# Altium PCB 3_5_inch_V1.PcbDoc
Units mm, origin at the board's own origin, x right, y up, seen from the top; angles counter-clockwise.
Board outline 37.85 x 32.13 mm, 4 copper layers (Top Copper, Signal Layer 1, Signal Layer 2, Bottom Copper), stack 1.17 mm thick; 14 components, 43 nets, 124 pads, 111 vias.
Unrouted connection lines stored in the file: 2.
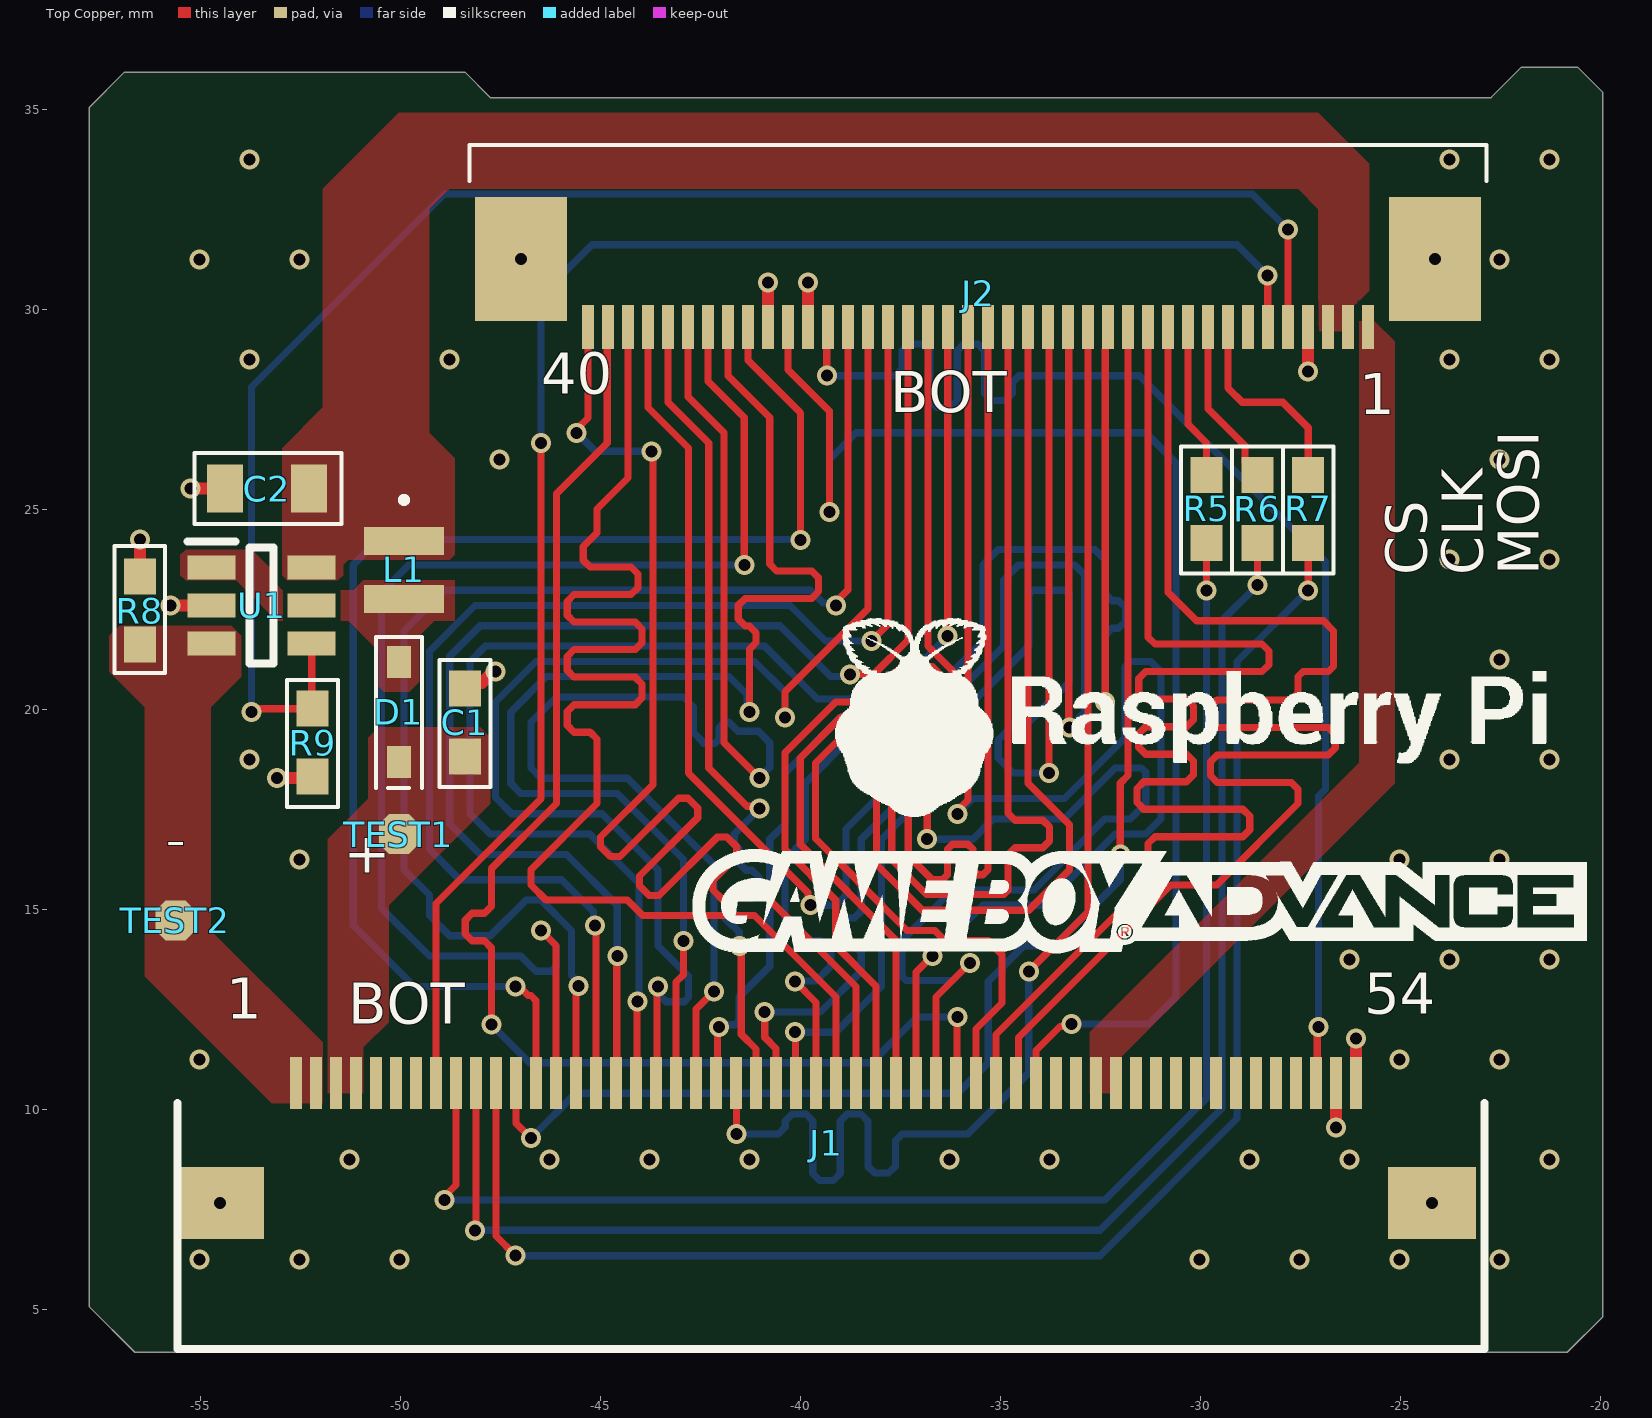
[diagram p0: Top Copper view]
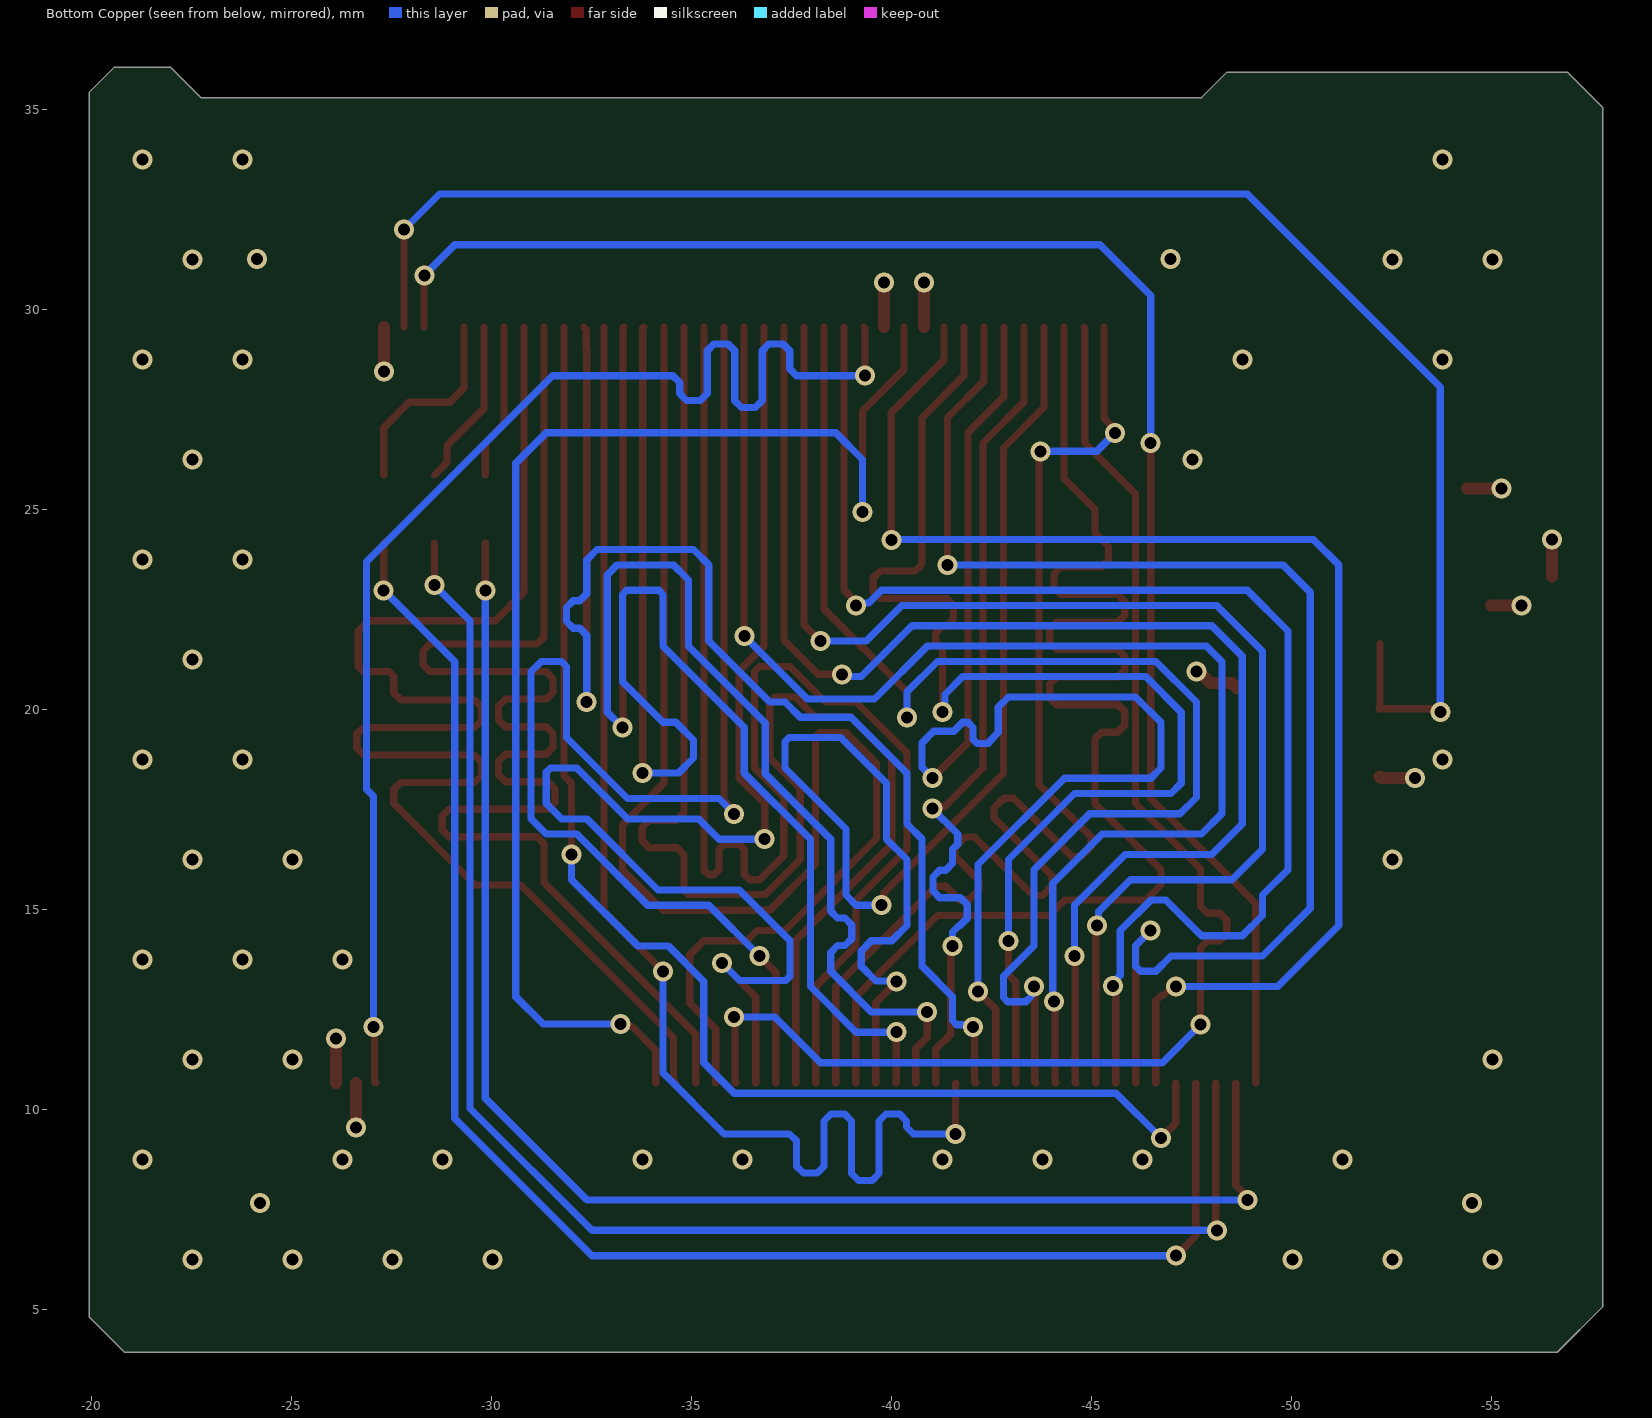
[diagram p1: Bottom Copper view, seen from below]
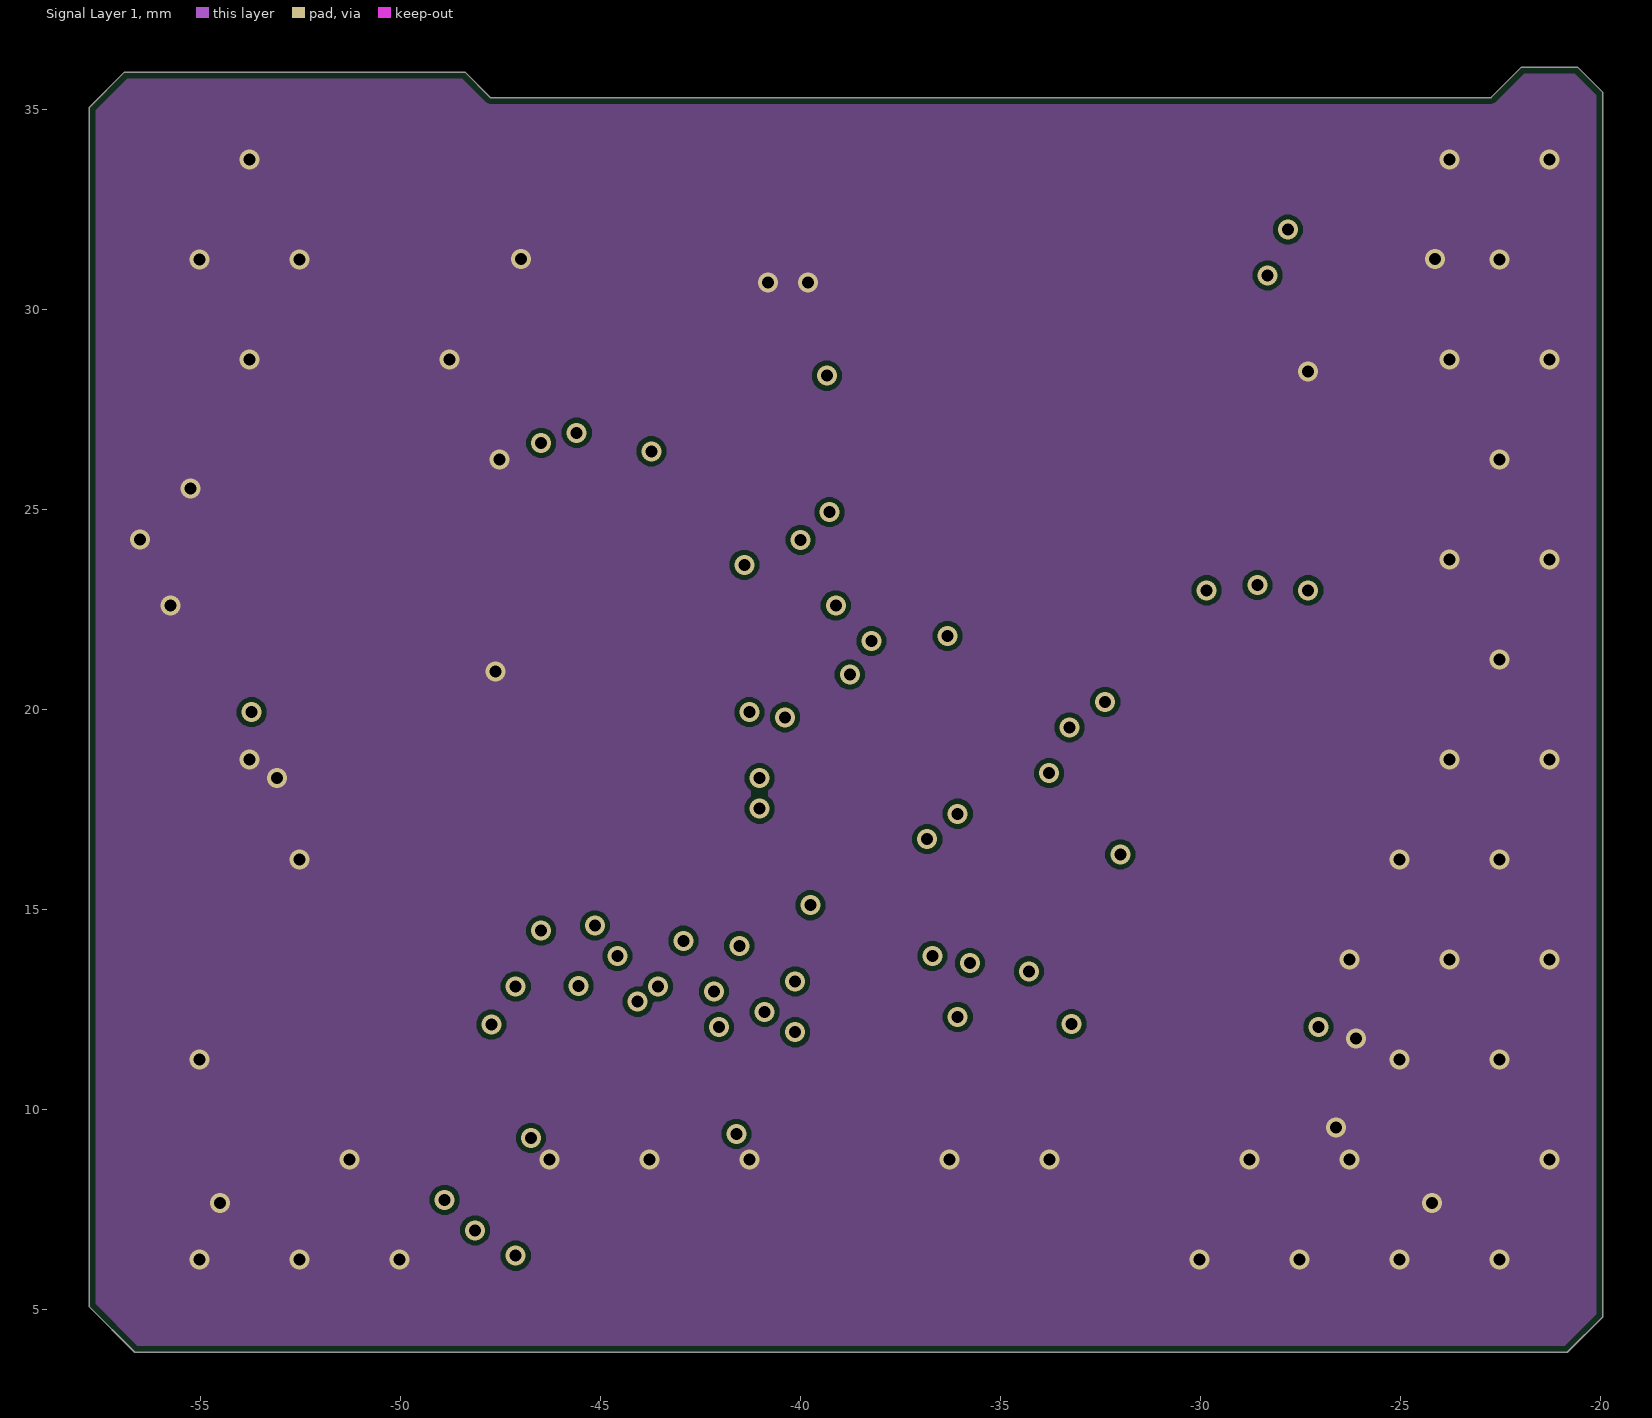
[diagram p2: Signal Layer 1]
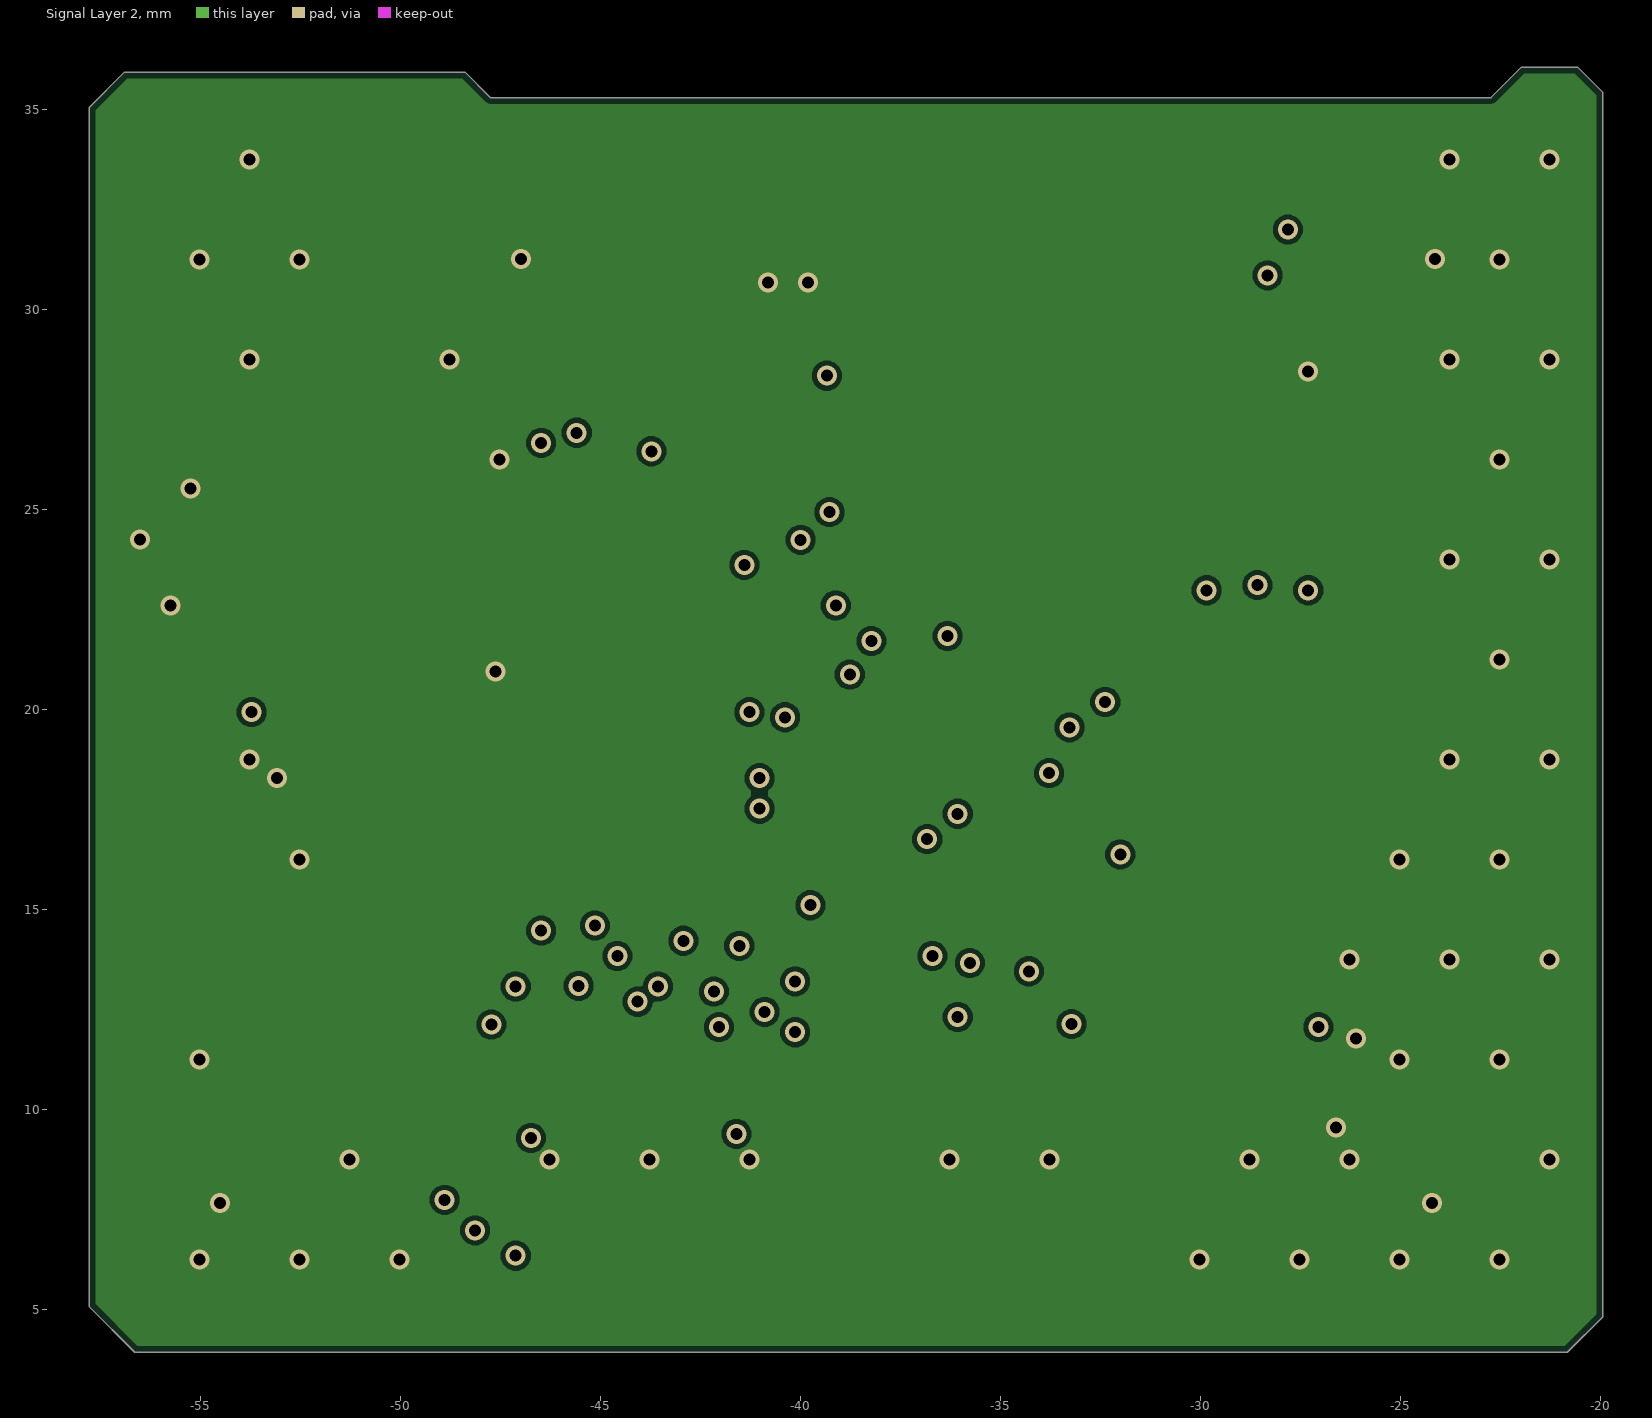
[diagram p3: Signal Layer 2]

## Layer stack, top to bottom
Top Mask: solder mask 0.015, Solder Resist, Dk 3.8
Top Copper: signal copper 0.035
Dielectric 1: prepreg 0.1, 2313, Dk 4.05
Signal Layer 1: signal copper 0.0175
Core: core 0.865, FR-4, Dk 4.5
Signal Layer 2: signal copper 0.0175
Dielectric 2: prepreg 0.1, 2313, Dk 4.05
Bottom Copper: signal copper 0.035
Bottom Mask: solder mask 0.015, Solder Resist, Dk 3.8

## Board outline
-57.785,5.08 -57.785,35.052 -56.896,35.941 -48.387,35.941 -47.752,35.306 -22.733,35.306 -21.971,36.068 -20.574,36.068 -19.939,35.433 -19.939,4.826 -20.828,3.937 -56.642,3.937

## Design rules (kind name [scope] priority, off if disabled: settings)
BoardOutlineClearance [All] p1: gap=0.15 ignorepadtopadclearanceinfootprint=FALSE except(0.4: Arc-SplitBarrior Arc-SplitContinuation Track-SplitBarrior Track-SplitContinuation SMDPad-SplitBarrior SMDPad-SplitContinuation THPad-SplitBarrior THPad-SplitContinuation Via-SplitBarrior Via-SplitContinuation Fill-SplitBarrior Fill-SplitContinuation Poly-SplitBarrior Poly-SplitContinuation Region-SplitBarrior Region-SplitContinuation Text-SplitBarrior Text-SplitContinuation)
Clearance USB [InAnyDifferentialPair] p1: gap=0.25 ignorepadtopadclearanceinfootprint=FALSE except(0.09: Arc-Arc Arc-Track Arc-SMDPad Arc-THPad Arc-Via Track-Track Track-SMDPad Track-THPad Track-Via SMDPad-SMDPad SMDPad-THPad SMDPad-Via THPad-THPad THPad-Via Via-Via; 0.127: Arc-Hole Track-Hole SMDPad-Hole THPad-Hole Via-Hole Fill-Hole Poly-Hole Region-Hole Text-Hole; 0.254: Arc-Text Track-Text SMDPad-Text THPad-Text Via-Text Fill-Text Poly-Text Region-Text Text-Text)
Clearance RGB24 [InNetClass('RGB24Bit')] p2: gap=0.09 ignorepadtopadclearanceinfootprint=FALSE except(0.12: SMDPad-Fill SMDPad-Poly SMDPad-Region THPad-Fill THPad-Poly THPad-Region Via-Fill Via-Poly Via-Region; 0.127: Arc-Hole Track-Hole SMDPad-Hole THPad-Hole Via-Hole Fill-Hole Poly-Hole Region-Hole Text-Hole; 0.25: Arc-Fill Arc-Poly Arc-Region Track-Fill Track-Poly Track-Region Fill-Fill Fill-Poly Fill-Region Poly-Poly Poly-Region Region-Region; 0.254: Arc-Text Track-Text SMDPad-Text THPad-Text Via-Text Fill-Text Poly-Text Region-Text Text-Text)
Clearance [All] p3: gap=0.12 ignorepadtopadclearanceinfootprint=FALSE except(0.09: Arc-Arc Arc-Track Arc-SMDPad Track-Track Track-SMDPad SMDPad-SMDPad; 0.127: Arc-Via Arc-Hole Track-Via Track-Hole SMDPad-Via SMDPad-Hole THPad-Via THPad-Hole Via-Via Via-Hole Fill-Hole Poly-Hole Region-Hole Text-Hole; 0.2: Arc-THPad Track-THPad SMDPad-THPad THPad-THPad; 0.254: Arc-Text Track-Text SMDPad-Text THPad-Text Via-Text Fill-Text Poly-Text Region-Text Text-Text)
ComponentClearance [All] p1: gap=0.127 collisioncheckmode=3 verticalgap=0.254 showdistances=FALSE
HoleSize [All] p1: absolutevalues=TRUE maxlimit=6.3 minlimit=0.3 maxpercent=80.000 minpercent=20.000
MinimumAnnularRing [All] p1: minimumring=0.076
MinimumSolderMaskSliver [All] p1: minsoldermaskwidth=0
PlaneClearance [All] p1: clearance=1
PlaneConnect [All] p1: planeconnectstyle=Direct reliefexpansion=0.508 reliefentries=4 reliefconductorwidth=0.254 reliefairgap=0.254
PolygonConnect PolygonConnect_1 [All] p1: connectstyle=Direct reliefconductorwidth=0.508 reliefentries=4 polygonreliefangle="45 Angle" airgapwidth=0.254
RoomDefinition 3_5_inch [InComponentClass('3_5_inch')] p1: confinementstyle=ConfineIn formatcopy=TRUE lockcomponents=FALSE outline -155.02,-43.742 -104.22,-43.742 -104.22,-18.342 -155.02,-18.342
RoutingCorners [All] p1: cornerstyle=Round minsetback=2.54 maxsetback=2.54
RoutingVias [All] p1: holewidth=0.5 width=1 viastyle="Through Hole" minholewidth=0.2 minwidth=0.45 maxholewidth=1 maxwidth=2
SilkToSilkClearance [All] p1: silktosilkclearance=0.1
SilkToSolderMaskClearance [IsPad] p1: minsilkscreentomaskgap=0.1 clearancetoexposedcopper=TRUE
SolderMaskExpansion [All] p1: expansion=0.102 istentingtop=FALSE
UnRoutedNet [All] p1: checkbadconnections=TRUE
Width [All] p1: maxlimit=8 minlimit=0.18 preferedwidth=0.18
Width "Schematic Width Constraint" [InNetClass('RGB24Bit')] p2: maxlimit=0.254 minlimit=0.18 preferedwidth=0.18 toplayer_maxwidth=0.18 bottomlayer_maxwidth=0.18 minimp=50.000000 maximp=50.000000 favimp=50.000000
21 further rules are at their usual default settings.

## Classes and differential pairs
net class RGB24Bit: CS DB_0 DB_1 DB_2 DB_3 DB_4 DB_5 DB_6 DB_7 DCLK DE DG_0 DG_1 DG_2 DG_3 DG_4 DG_5 DG_6 DG_7 DR_0 DR_1 DR_2 DR_3 DR_4 DR_5 DR_6 DR_7 GPIO_2 GPIO_3

## Components (designator, comment, footprint, x,y, rotation, side; value= is the part's Value field where it differs from the comment)
C1 "1UF 25v X5R 0603" "C 0603/1608" -48.387,19.685 r90 top
C2 "10uF 16V X7R 0805" "C 0805/2012" -53.34,25.527 r0 top
D1 "40V 250mA SOD323" SOD-323 -50.038,19.939 r90 top
J1 "54P 0.5m BOT" FFC2B35-54-G -42.858,9.818 r180 top locked
J2 "40P 0,5mm Bot" 417345920 -35.56,29.718 r180 top
L1 "6.8uH 0,.7A" NRH2410T6R8MN -49.911,23.495 r270 top
R5 "0R" "R 0603/1608" -29.845,25.019 r90 top
R6 "0R" "R 0603/1608" -28.575,25.019 r90 top
R7 "0R" "R 0603/1608" -27.305,25.019 r90 top
R8 "10R 0603 1%" "R 0603/1608" -56.515,22.479 r270 top
R9 "1M 1% 1/10W 0603" "R 0603/1608" -52.197,19.177 r90 top
TEST1 "TestPad" TestPad -50.038,16.891 r90 top
TEST2 "TestPad" TestPad -55.626,14.732 r90 top
U1 "Backlight Driver" SOT95P280X145-6N -53.467,22.606 r0 top

## Footprints (in the part's own frame and the unit in brackets; to place one, negate y for a bottom-side part, rotate by r counter-clockwise, add the part's x,y. Pads: shape width x height; smd on the part's side, far side on the other; paste and mask are expansions set on the pad)
417345920 [mm]
  rect 0.3x1.1 smd: 1(-9.75,0.15) 2(-9.25,0.15) 3(-8.75,0.15) 4(-8.25,0.15) 5(-7.75,0.15) 6(-7.25,0.15) 7(-6.75,0.15) 8(-6.25,0.15) 9(-5.75,0.15) 10(-5.25,0.15) 11(-4.75,0.15) 12(-4.25,0.15) 13(-3.75,0.15) 14(-3.25,0.15) 15(-2.75,0.15) 16(-2.25,0.15) 17(-1.75,0.15) 18(-1.25,0.15) 19(-0.75,0.15) 20(-0.25,0.15) 21(0.25,0.15) 22(0.75,0.15) 23(1.25,0.15) 24(1.75,0.15) 25(2.25,0.15) 26(2.75,0.15) 27(3.25,0.15) 28(3.75,0.15) 29(4.25,0.15) 30(4.75,0.15) 31(5.25,0.15) 32(5.75,0.15) 33(6.25,0.15) 34(6.75,0.15) 35(7.25,0.15) 36(7.75,0.15) 37(8.25,0.15) 38(8.75,0.15) 39(9.25,0.15) 40(9.75,0.15)
  rect 2.3x3.1 smd: SH(-11.42,-1.55) SH(11.42,-1.55)
  silkscreen extent -12.72,-4.4 12.72,-3.5, body extent -12.72,-4.62 12.72,0.49, height 2.05
"C 0603/1608" [mm]
  rect 0.9x0.8 smd: 1(-0.85,0) 2(0.85,0)
  silkscreen extent -1.61,-0.64 1.56,0.64, body extent -1.3,-0.4 1.3,0.4, height 0.64
"C 0805/2012" [mm]
  rect 0.9x1.2 smd: 1(-1.05,0) 2(1.05,0)
  silkscreen extent -1.81,-0.89 1.87,0.89, body extent -1.5,-0.6 1.5,0.6, height 0.64
FFC2B35-54-G [mm]
  rect 0.3x1.3 smd: 1(9.75,-0.85) 2(9.25,-0.85) 3(8.75,-0.85) 4(8.25,-0.85) 5(7.75,-0.85) 6(7.25,-0.85) 7(6.75,-0.85) 8(6.25,-0.85) 9(5.75,-0.85) 10(5.25,-0.85) 11(4.75,-0.85) 12(4.25,-0.85) 13(3.75,-0.85) 14(3.25,-0.85) 15(2.75,-0.85) 16(2.25,-0.85) 17(1.75,-0.85) 18(1.25,-0.85) 19(0.75,-0.85) 20(0.25,-0.85) 21(-0.25,-0.85) 22(-0.75,-0.85) 23(-1.25,-0.85) 24(-1.75,-0.85) 25(-2.25,-0.85) 26(-2.75,-0.85) 27(-3.25,-0.85) 28(-3.75,-0.85) 29(-4.25,-0.85) 30(-4.75,-0.85) 31(-5.25,-0.85) 32(-5.75,-0.85) 33(-6.25,-0.85) 34(-6.75,-0.85) 35(-7.25,-0.85) 36(-7.75,-0.85) 37(-8.25,-0.85) 38(-8.75,-0.85) 39(-9.25,-0.85) 40(-9.75,-0.85) 41(-10.25,-0.85) 42(-10.75,-0.85) 43(-11.25,-0.85) 44(-11.75,-0.85) 45(-12.25,-0.85) 46(-12.75,-0.85) 47(-13.25,-0.85) 48(-13.75,-0.85) 49(-14.25,-0.85) 50(-14.75,-0.85) 51(-15.25,-0.85) 52(-15.75,-0.85) 53(-16.25,-0.85) 54(-16.75,-0.85)
  rect 2.2x1.8 smd: SH(-18.65,2.15) SH(11.65,2.15)
  silkscreen extent -19.96,-0.35 12.72,5.8, body extent -19.21,-1.16 12.19,5.6, height 1.99
NRH2410T6R8MN [mm]
  rect 0.7x2 smd: 1(-0.725,0) 2(0.725,0)
  silkscreen extent -1.8,-0.05 -1.7,0.05, body extent -1.2,-1.2 1.2,1.2, height 1.1
"R 0603/1608" [mm]
  rect 0.9x0.8 smd: 1(-0.85,0) 2(0.85,0)
  silkscreen extent -1.61,-0.64 1.56,0.64, body extent -1.3,-0.4 1.3,0.4, height 0.64
SOD-323 [mm]
  rect 0.8x0.6 smd: 1(-1.25,0) 2(1.25,0)
  silkscreen extent -1.9,-0.58 1.88,0.58, body extent -1.23,-0.63 1.28,0.63, height 0.9
SOT95P280X145-6N [mm]
  rect 1.2x0.6 smd: 1(-1.25,0.95) 2(-1.25,0) 3(-1.25,-0.95) 4(1.25,-0.95) 5(1.25,0) 6(1.25,0.95)
  silkscreen extent -1.85,-1.45 0.3,1.6, body extent -1.4,-1.45 1.4,1.45, height 1.45
TestPad [mm]
  oct 1x1 smd paste-2: 1(0,0)

## Part data
C1: library part CC0603KRX5R8BB105, "CAP CER 1UF 25V X5R 0603", Capacitance=1uF, Case Code (Imperial)=0603, Case Code (Metric)=1608, Dielectric=X5R, Manufacturer=Yageo, Max Operating Temperature=85°C, Min Operating Temperature=-55°C, Package Quantity=1, Supplier Part Number 1=603-CC603KRX5R8BB105, Tolerance=10%, Voltage Rating=25V, Case/Package=0603, ComponentLink1Description=https://datasheet.ciiva.com/176/mlccorderingcode-176785.pdf?src-supplier=Digi-Key, ComponentLink1URL=https://datasheet.ciiva.com/176/mlccorderingcode-176785.pdf?src-supplier=Digi-Key, ComponentLink2Description=https://datasheet.ciiva.com/176/mlccorderingcode-176786.pdf?src-supplier=Digi-Key, ComponentLink2URL=https://datasheet.ciiva.com/176/mlccorderingcode-176786.pdf?src-supplier=Digi-Key, ComponentLink3Description=https://datasheet.ciiva.com/176/mlccorderingcode-176787.pdf?src-supplier=Digi-Key, ComponentLink3URL=https://datasheet.ciiva.com/176/mlccorderingcode-176787.pdf?src-supplier=Digi-Key, ComponentLink4Description=https://datasheet.ciiva.com/17436/upy-gphc-x5r-4v-to-50v-12-17436952.pdf?src-supplier=Avnet+Europe, ComponentLink4URL=https://datasheet.ciiva.com/17436/upy-gphc-x5r-4v-to-50v-12-17436952.pdf?src-supplier=Avnet+Europe, ComponentLink5Description=https://datasheet.ciiva.com/7978/1525783-7978171.pdf?src-supplier=Element14, ComponentLink5URL=https://datasheet.ciiva.com/7978/1525783-7978171.pdf?src-supplier=Element14, ComponentLink6Description=https://datasheet.ciiva.com/11586/upy-gphc-x5r-4v-to-50v-12-11586318.pdf?src-supplier=Avnet, ComponentLink6URL=https://datasheet.ciiva.com/11586/upy-gphc-x5r-4v-to-50v-12-11586318.pdf?src-supplier=Avnet, Depth=0.8mm, Halogen Free="Halogen Free", Height=0.8mm, Lead Free="Lead Free", Length=1.6mm, Manufacturer Part Number=CC0603KRX5R8BB105, Mount="Surface Mount", Number of Pins=2, Packaging="Tape and Reel", Pricing 1="1 = 0,10000, 10 = 0,04700, 50 = 0,04700, 100 = 0,01700, 1000 = 0,01600, 10000 = 0,00800 (USD)", Radiation Hardening=No, REACH SVHC="No SVHC", RoHS=Yes, Stock 1=9567246, Supplier 1=Mouser, Termination=SMD/SMT, Thickness=0.035inch, Voltage Rating (DC)=25V, Width=0.031inch
C2: library part CL21B106KOQNNNE, "CAP CER 10UF 16V X7R 0805", Manufacturer="Samsung Electro-Mechanics", Operating Temperature="-55°C ~ 125°C", Package / Case="0805 (2012 Metric)", Ratings=-, Supplier Part Number 1=1276-2872-1-ND, Temperature Coefficient=X7R, Tolerance=±10%, Voltage - Rated=16V, Applications="General Purpose", Category=Capacitors, ComponentLink1Description=http://www.samsungsem.com/kr/support/product-search/mlcc/CL21B106KOQNNNE.jsp, ComponentLink1URL=http://www.samsungsem.com/kr/support/product-search/mlcc/CL21B106KOQNNNE.jsp, Features=-, Height - Seated (Max)=-, Lead Spacing=-, Lead Style=-, Manufacturer Part Number=CL21B106KOQNNNE, Mounting Type="Surface Mount, MLCC", Notification="Current market demand for these product types have resulted in fluctuating and extending lead times. Lead times may differ.", Packaging="Cut Tape (CT)", Part Status=Active, Pricing 1="1=0.24, 10=0.163, 100=0.0923, 500=0.06514, 1000=0.057 (GBP)", RoHS="RoHS Compliant", Size / Dimension="0.079\" L x 0.049\" W (2.00mm x 1.25mm)", Stock 1=20000, Supplier 1=Digi-Key, Thickness (Max)="0.055\" (1.40mm)"
D1: library part NSR0240HT1G, "DIODE SCHOTTKY 40V 250MA SOD323", Average Rectified Current=250mA, Case/Package=SOD-323-2, Forward Voltage=710mV, Manufacturer="ON Semiconductor", Max Forward Surge Current (Ifsm)=1A, Max Operating Temperature=150°C, Max Repetitive Reverse Voltage (Vrrm)=40V, Max Reverse Leakage Current=10uA, Min Operating Temperature=-55°C, Package Quantity=1, Power Dissipation=270mW, Supplier Part Number 1=863-NSR0240HT1G, ComponentLink1Description=https://datasheet.ciiva.com/4714/nsr0240h-d-113658-4714368.pdf?src-supplier=Mouser, ComponentLink1URL=https://datasheet.ciiva.com/4714/nsr0240h-d-113658-4714368.pdf?src-supplier=Mouser, ComponentLink2Description=https://datasheet.ciiva.com/8293/nsr0240h-d-8293840.pdf?src-supplier=Avnet, ComponentLink2URL=https://datasheet.ciiva.com/8293/nsr0240h-d-8293840.pdf?src-supplier=Avnet, ComponentLink3Description=https://datasheet.ciiva.com/25949/nsr0240h-d-25949637.pdf?src-supplier=Avnet+Europe, ComponentLink3URL=https://datasheet.ciiva.com/25949/nsr0240h-d-25949637.pdf?src-supplier=Avnet+Europe, ComponentLink4Description=https://datasheet.ciiva.com/915/nsr0240h-d-915416.pdf?src-supplier=Digi-Key, ComponentLink4URL=https://datasheet.ciiva.com/915/nsr0240h-d-915416.pdf?src-supplier=Digi-Key, ComponentLink5Description=https://datasheet.ciiva.com/915/nsr0240h-d-915417.pdf?src-supplier=Digi-Key, ComponentLink5URL=https://datasheet.ciiva.com/915/nsr0240h-d-915417.pdf?src-supplier=Digi-Key, ComponentLink6Description=https://datasheet.ciiva.com/16396/nsr0240h-d-16396521.pdf?src-supplier=Future+Electronics, ComponentLink6URL=https://datasheet.ciiva.com/16396/nsr0240h-d-16396521.pdf?src-supplier=Future+Electronics, ComponentLink7Description=https://datasheet.ciiva.com/915/nsr0240h-d-915418.pdf?src-supplier=Digi-Key, ComponentLink7URL=https://datasheet.ciiva.com/915/nsr0240h-d-915418.pdf?src-supplier=Digi-Key, ComponentLink8Description=https://datasheet.ciiva.com/7963/nsr0240h-d-7963165.pdf?src-supplier=Element14, ComponentLink8URL=https://datasheet.ciiva.com/7963/nsr0240h-d-7963165.pdf?src-supplier=Element14, Contact Plating=Tin, Element Configuration=Single, Forward Current=250mA, Height=1mm, Lead Free="Lead Free", Length=1.8mm, Manufacturer Part Number=NSR0240HT1G, Max Reverse Voltage (DC)=40V, Max Surge Current=1A, Number of Pins=2, Packaging="Tape and Reel", Peak Non-Repetitive Surge Current=1A, Peak Reverse Current=10uA, Pricing 1="1 = 0,23000, 10 = 0,15400, 50 = 0,15400, 100 = 0,06500, 1000 = 0,04400, 10000 = 0,03000 (USD)", Radiation Hardening=No, REACH SVHC="No SVHC", Recovery Time=3ns, Reverse Recovery Time=3ns, RoHS=Yes, Stock 1=30582, Supplier 1=Mouser, Width=1.35mm
J1: library part FFC2B35-54-G, "54W, 0.5MM Ffc Con, R/a, Bottom Con", Manufacturer="Global Connector Technology", Supplier Part Number 1=640-FFC2B35-54-G, Manufacturer Part Number=FFC2B35-54-G, RoHS=No, Supplier 1=Mouser
J2: library part 4-1734592-0, "CONN FPC BOTTOM 40POS 0.50MM R/A", Actuator Color=Beige, Contact Current Rating=500mA, Contact Resistance=35mR, Flammability Rating="UL94 V-0", Housing Color=Natural, Manufacturer="TE Connectivity", Max Operating Temperature=85°C, Max Voltage Rating (AC)=250V, Min Operating Temperature=-40°C, Package Quantity=2000, Supplier Part Number 1=571-4-1734592-0, Actuator Material=Thermoplastic, Category="FFC / FPC", ComponentLink1Description=https://datasheet.ciiva.com/16317/4-1734592-0-16317310.pdf?src-supplier=Future+Electronics, ComponentLink1URL=https://datasheet.ciiva.com/16317/4-1734592-0-16317310.pdf?src-supplier=Future+Electronics, ComponentLink2Description=https://datasheet.ciiva.com/10365/eng-ds-1-1773440-6-0506-10365927.pdf?src-supplier=Avnet, ComponentLink2URL=https://datasheet.ciiva.com/10365/eng-ds-1-1773440-6-0506-10365927.pdf?src-supplier=Avnet, ComponentLink3Description=https://datasheet.ciiva.com/46396/1795029-46396773.pdf?src-supplier=Element14, ComponentLink3URL=https://datasheet.ciiva.com/46396/1795029-46396773.pdf?src-supplier=Element14, ComponentLink4Description=https://datasheet.ciiva.com/1437/586796-1437950.pdf?src-supplier=Element14, ComponentLink4URL=https://datasheet.ciiva.com/1437/586796-1437950.pdf?src-supplier=Element14, ComponentLink5Description=https://datasheet.ciiva.com/669/eng-cd-1734592-c-c-1734592-669272.pdf?src-supplier=Digi-Key, ComponentLink5URL=https://datasheet.ciiva.com/669/eng-cd-1734592-c-c-1734592-669272.pdf?src-supplier=Digi-Key, ComponentLink6Description=https://datasheet.ciiva.com/669/eng-cd-1734592-c-c-1734592-669273.pdf?src-supplier=Digi-Key, ComponentLink6URL=https://datasheet.ciiva.com/669/eng-cd-1734592-c-c-1734592-669273.pdf?src-supplier=Digi-Key, ComponentLink7Description=https://datasheet.ciiva.com/669/eng-cd-1734592-c-c-1734592-669274.pdf?src-supplier=Digi-Key, ComponentLink7URL=https://datasheet.ciiva.com/669/eng-cd-1734592-c-c-1734592-669274.pdf?src-supplier=Digi-Key, Connector System=Flex-to-Board, Connector Type=Receptacle,Connector,Socket, Contact Location=Bottom, Contact Material=Bronze, Contact Plating=Gold, Current Rating=500mA, Depth=5.1mm, ELV=Compliant, Gender=Female, Height=2.05mm, Housing Material=Polymer, Lead Free="Lead Free", Length=25.43mm, Manufacturer Part Number=4-1734592-0, Mating Alignment="Yes (With)", Mount="Surface Mount", Number of Contacts=40, Number of Positions=40, Number of Rows=1, Orientation="Right Angle", Packaging="Tape and Reel", PCB Mount Alignment="No (Without)", PCB Mount Retention=With, PCB Mounting Orientation="Right Angle", Pitch=0.5mm, Plating Thickness=0.025um, Pricing 1="1=0,99000, 10=0,82200, 50=0,82200, 100=0,78800, 1000=0,75400, 10000=0,66800 (USD)", Radiation Hardening=No, Reach SVHC Compliant=Yes, RoHS=Yes, RoHS Compliant=Yes, Sealable="No (Without)", Series=-, Shielding=Unshielded, Shrouded="Yes (With)", Stock 1=14667, Supplier 1=Mouser, Termination=SMD/SMT, Voltage Rating=250V, Width=5.1mm, Wire/Cable Type="Flat Flex"
L1: library part NRH2410T6R8MN, "Inductor Power Shielded Wirewound 6.8uH 20% 100KHz Ferrite 0.57A 0.492Ohm DCR T/R", Case/Package=Nonstandard, Current Rating=570mA, DC Resistance (DCR)=492mR, Inductance=6.8uH, Inductance Tolerance=20%, Manufacturer="Taiyo Yuden", Max DC Current=750mA, Max Operating Temperature=120°C, Min Operating Temperature=-25°C, Package Quantity=2500, Resistor Type=Wirewound, Self Resonant Frequency=43MHz, Supplier Part Number 1=963-NRH2410T6R8MN, Test Frequency=100kHz, Category="Fixed Inductors", ComponentLink1Description=https://datasheet.ciiva.com/1043/nrh2410t6r8mn-ss-1043809.pdf?src-supplier=Digi-Key, ComponentLink1URL=https://datasheet.ciiva.com/1043/nrh2410t6r8mn-ss-1043809.pdf?src-supplier=Digi-Key, ComponentLink2Description=https://datasheet.ciiva.com/8502/nrh2410t6r8mn-ss-8502817.pdf?src-supplier=Avnet, ComponentLink2URL=https://datasheet.ciiva.com/8502/nrh2410t6r8mn-ss-8502817.pdf?src-supplier=Avnet, ComponentLink3Description=https://datasheet.ciiva.com/25606/0900766b810b3cd2-25606903.pdf?src-supplier=RSComponents, ComponentLink3URL=https://datasheet.ciiva.com/25606/0900766b810b3cd2-25606903.pdf?src-supplier=RSComponents, Core Material=Ferrite, Depth=2.5mm, Halogen Free="Halogen Free", Height=1mm, Height - Seated (Max)=0.039inch, Lead Pitch=1.45mm, Length=2.4mm, Manufacturer Part Number=NRH2410T6R8MN, Mount="Surface Mount", Number of Pins=2, Packaging="Tape and Reel", Pricing 1="1=0,23000, 10=0,15400, 50=0,15400, 100=0,12400, 1000=0,09100, 10000=0,06800 (USD)", Radiation Hardening=No, REACH SVHC="No SVHC", RoHS=Yes, RoHS Compliant=Yes, Saturation Current=750mA, Series=NRH, Shielding=Shielded, Stock 1=34335, Supplier 1=Mouser, Termination=SMD/SMT, Tolerance=20%, Width=0.094inch
R5 R6 R7: library part RC0603JR-070RL, "RES SMD 0 OHM JUMPER 1/10W 0603", Case Code (Imperial)=0603, Case Code (Metric)=1608, Manufacturer=Yageo, Max Operating Temperature=155°C, Min Operating Temperature=-55°C, Package Quantity=5000, Power Rating=100mW, Resistance=0mR, Supplier Part Number 1=603-RC0603JR-070RL, Temperature Coefficient=200ppm/°C, Tolerance=1%, Voltage Rating=50V, Case/Package=0603, ComponentLink1Description=https://datasheet.ciiva.com/11808/pyu-r-int-6-11808700.pdf?src-supplier=RSComponents, ComponentLink1URL=https://datasheet.ciiva.com/11808/pyu-r-int-6-11808700.pdf?src-supplier=RSComponents, ComponentLink2Description=https://datasheet.ciiva.com/7746/1738695-7746421.pdf?src-supplier=Element14, ComponentLink2URL=https://datasheet.ciiva.com/7746/1738695-7746421.pdf?src-supplier=Element14, ComponentLink3Description=https://datasheet.ciiva.com/8883/pyu-rc0603-51-rohs-l-4-8883045.pdf?src-supplier=Avnet, ComponentLink3URL=https://datasheet.ciiva.com/8883/pyu-rc0603-51-rohs-l-4-8883045.pdf?src-supplier=Avnet, ComponentLink4Description=https://datasheet.ciiva.com/15189/getdatasheetpartid-329462-15189845.pdf?src-supplier=Verical, ComponentLink4URL=https://datasheet.ciiva.com/15189/getdatasheetpartid-329462-15189845.pdf?src-supplier=Verical, ComponentLink5Description=https://datasheet.ciiva.com/7746/1738695-7746422.pdf?src-supplier=Element14, ComponentLink5URL=https://datasheet.ciiva.com/7746/1738695-7746422.pdf?src-supplier=Element14, ComponentLink6Description=https://datasheet.ciiva.com/12555/rc0603-272842-12555254.pdf?src-supplier=Mouser, ComponentLink6URL=https://datasheet.ciiva.com/12555/rc0603-272842-12555254.pdf?src-supplier=Mouser, ComponentLink7Description=https://datasheet.ciiva.com/22747/443971-22747530.pdf?src-supplier=Element14, ComponentLink7URL=https://datasheet.ciiva.com/22747/443971-22747530.pdf?src-supplier=Element14, Composition="Thick Film", Contact Plating=Tin, Depth=0.8mm, Height=0.45mm, Lead Free="Lead Free", Length=1.6mm, Manufacturer Part Number=RC0603JR-070RL, Military Standard=Not, Number of Pins=2, Packaging="Tape and Reel", Pricing 1="1 = 0,10000, 10 = 0,01500, 50 = 0,01500, 100 = 0,00500, 1000 = 0,00400, 10000 = 0,00400 (USD)", Radiation Hardening=No, REACH SVHC="No SVHC", RoHS=Yes, Stock 1=11022274, Supplier 1=Mouser, Termination=SMD/SMT, Voltage Rating (DC)=50V, Width=0.8mm
R8: library part RT0603FRE0710RL, "High Precision-High Stability Chip Resistor Thin Film 0603 10Ohm 1% Paper T/R", Case Code (Imperial)=0603, Case Code (Metric)=1608, Manufacturer=Yageo, Max Operating Temperature=125°C, Max Power Dissipation=100mW, Min Operating Temperature=-55°C, Package Quantity=5000, Resistance=10R, Resistance Tolerance=1%, Resistor Type="Thin Film", Supplier Part Number 1=603-RT0603FRE0710RL, Temperature Coefficient=50ppm/°C, Voltage Rating=75V, Case/Package=0603, Category="Chip SMD Resistors", ComponentLink1Description=https://datasheet.ciiva.com/12834/pyu-rt-1-to-0-05-rohs-l-4-12834894.pdf?src-supplier=Mouser, ComponentLink1URL=https://datasheet.ciiva.com/12834/pyu-rt-1-to-0-05-rohs-l-4-12834894.pdf?src-supplier=Mouser, ComponentLink2Description=https://datasheet.ciiva.com/2559/pyu-rt-1-to-0-05-rohs-l-5-2559486.pdf?src-supplier=Digi-Key, ComponentLink2URL=https://datasheet.ciiva.com/2559/pyu-rt-1-to-0-05-rohs-l-5-2559486.pdf?src-supplier=Digi-Key, Construction=Rectangular, Contact Plating=Tin,Lead, Depth=0.8mm, Features="Moisture Resistant", Height=0.022inch, Lead Free="Lead Free", Length=1.6mm, Manufacturer Part Number=RT0603FRE0710RL, Military Standard=Not, Number of Pins=2, Number of Terminations=2, Packaging="Tape and Reel", Power Rating=100mW, Pricing 1="1=0,10000, 10=0,06200, 50=0,06200, 100=0,02500, 1000=0,01200, 10000=0,00800 (USD)", REACH SVHC=Unknown, RoHS=Yes, RoHS Compliant=Yes, Series=RT, Stock 1=38412, Supplier 1=Mouser, Termination=SMD/SMT, Tolerance=1%, Voltage Rating (DC)=75V, Width=0.031inch
R9: library part RC0603FR-071ML, "RES SMD 1M OHM 1% 1/10W 0603", Case Code (Imperial)=0603, Case Code (Metric)=1608, Manufacturer 1=Yageo, Max Operating Temperature=155°C, Min Operating Temperature=-55°C, Package Quantity=5000, Power Rating=100mW, Resistance=1MR, Supplier Part Number 1=311-1.00MHRDKR-ND, Temperature Coefficient=100ppm/°C, Tolerance=1%, Voltage Rating=50V, Case/Package=0603, ComponentLink1Description=https://datasheet.ciiva.com/11819/0900766b80f96399-11819295.pdf?src-supplier=RSComponents, ComponentLink1URL=https://datasheet.ciiva.com/11819/0900766b80f96399-11819295.pdf?src-supplier=RSComponents, ComponentLink2Description=https://datasheet.ciiva.com/7983/443971-7983614.pdf?src-supplier=Element14, ComponentLink2URL=https://datasheet.ciiva.com/7983/443971-7983614.pdf?src-supplier=Element14, ComponentLink3Description=https://datasheet.ciiva.com/12555/rc0603-272842-12555388.pdf?src-supplier=Mouser, ComponentLink3URL=https://datasheet.ciiva.com/12555/rc0603-272842-12555388.pdf?src-supplier=Mouser, Composition="Thick Film", Depth=0.8mm, Height=0.45mm, Lead Free="Lead Free", Length=1.6mm, Manufacturer Part Number 1=RC0603FR-071ML, Military Standard=Not, Number of Pins=2, Packaging="Tape and Reel", Pricing 1="1=0,10000, 10=0,02400, 100=0,00970, 1000=0,00437, 2500=0,00379 (USD)", REACH SVHC="No SVHC", RoHS=Yes, Stock 1=9751331, Supplier 1=Digi-Key, Termination=SMD/SMT, Voltage Rating (DC)=50V, Width=0.8mm
TEST1 TEST2: library part PP_SMT_ROUND_2MM, "Probe Pad, SMT, ROUND, 2.0MM"
U1: library part AP3032KTR-G1, "AP3032 Series 9 V 1.3 MHz Surface Mount White LED Step-Up Converter - SOT-23-6", Case/Package=SOT-23-6, Frequency=1MHz, Manufacturer=Diodes, Max Input Voltage=9V, Max Operating Temperature=85°C, Max Output Voltage=38V, Min Input Voltage=2.7V, Min Operating Temperature=-40°C, Output Current per Channel=1.4A, Package Quantity=3000, Supplier Part Number 1=621-AP3032KTR-G1, Switching Frequency=750kHz, Category="LED Drivers", ComponentLink1Description=https://datasheet.ciiva.com/29602/ap3032-29602682.pdf?src-supplier=Digi-Key, ComponentLink1URL=https://datasheet.ciiva.com/29602/ap3032-29602682.pdf?src-supplier=Digi-Key, ComponentLink2Description=https://datasheet.ciiva.com/29603/ap3032-29603101.pdf?src-supplier=Digi-Key, ComponentLink2URL=https://datasheet.ciiva.com/29603/ap3032-29603101.pdf?src-supplier=Digi-Key, ComponentLink3Description=https://datasheet.ciiva.com/29603/ap3032-29603100.pdf?src-supplier=Digi-Key, ComponentLink3URL=https://datasheet.ciiva.com/29603/ap3032-29603100.pdf?src-supplier=Digi-Key, Dimming=PWM, Lead Free="Lead Free", Manufacturer Part Number=AP3032KTR-G1, Max Supply Voltage=9V, Mount="Surface Mount", Number of Channels=1, Number of Outputs=1, Number of Pins=6, Packaging="Tape and Reel", Pricing 1="1=0,41000, 10=0,33600, 50=0,33600, 100=0,20700, 500=0,17200, 1000=0,12900, 3000=0,11700, 9000=0,10300, 10000=0,10300, 24000=0,09700 (USD)", RoHS=Yes, RoHS Compliant=Yes, Stock 1=35875, Supplier 1=Mouser, Topology=Boost, Weight=0.000529oz

## Via types
v1: diameter 0.5/0.5/0.5/0.5 (per signal layer), hole 0.3, Top Copper to Bottom Copper, tented both sides, 111 vias

## Nets (pads, with @x,y where several pads share a name; then routed paths per layer and width w, separated by ;. In a path a pad name is that pad's centre, name@x,y a point inside that pad or via, vN(x,y) a via of type N, cw(c..) or ccw(c..) an arc to the next point about the centre after c; other vN are vias at no path point)
3V3_SYS: J1.41 J1.42 J2.1
CLK_SPI: J2.9 R6.2 | length 4.2
  Top Copper w0.18: J2.9 -29.81,27.524 -28.885,26.599 -28.885,26.179 R6.2
CS: J2.10 R5.2 | length 3.9
  Top Copper w0.18: J2.10 -30.31,27.135 -29.845,26.67 R5.2
CTRL_WLED: J2.5 R9.2 U1.4 | length 42
  Top Copper w0.18: v1(-53.721,19.939) -53.633,20.027 R9.2 -52.217,20.047 U1.4 ; v1(-27.813,32.004) -27.81,32.001 J2.5
  Bottom Copper w0.18: v1(-53.721,19.939) -53.721,28.067 -48.895,32.893 -28.702,32.893 v1(-27.813,32.004)
DB_0: J1.12 J2.13 | length 34
  Top Copper w0.18: J1.12 -47.108,9.665 v1(-46.737,9.294) ; v1(-32.004,16.383) -32.004,18.161 -31.81,18.355 J2.13
  Bottom Copper w0.18: v1(-46.737,9.294) -45.617,10.414 -36.068,10.414 -35.306,11.176 -35.306,13.208 -34.417,14.097 -33.655,14.097 -32.004,15.748 v1(-32.004,16.383)
DB_1: J1.13 J2.32 | length 33.7
  Top Copper w0.18: v1(-47.117,13.081) -47.03,13.081 -46.804,12.855 -46.735,12.855 -46.608,12.727 J1.13 ; J2.32 -41.31,28.737 -39.995,27.422 v1(-39.995,24.249)
  Bottom Copper w0.18: v1(-47.117,13.081) -49.657,13.081 -51.181,14.605 -51.181,23.622 -50.546,24.257 -40.003,24.257 v1(-39.995,24.249)
DB_2: J1.14 J2.34 | length 33.7
  Top Copper w0.18: v1(-46.482,14.478) -46.108,14.104 J1.14 ; J2.34 -42.31,28.213 -41.402,27.305 v1(-41.402,23.622)
  Bottom Copper w0.18: v1(-46.482,14.478) -46.101,14.097 -46.101,13.589 -46.228,13.462 -46.609,13.462 -46.99,13.843 -49.276,13.843 -50.471,15.038 -50.471,22.935 -49.784,23.622 v1(-41.402,23.622)
DB_3: J1.15 J2.27 | length 34.2
  Top Copper w0.18: J1.15 -45.608,13.034 v1(-45.544,13.098) ; v1(-39.116,22.606) -39.116,22.693 -38.81,22.999 J2.27
  Bottom Copper w0.18: v1(-45.544,13.098) -45.544,13.185 -45.72,13.361 -45.72,14.478 -46.482,15.24 -46.863,15.24 -47.752,14.351 -48.768,14.351 -49.276,14.859 -49.276,15.367 -49.911,16.002 -49.911,21.971 -48.895,22.987 -39.751,22.987 -39.431,22.667 -39.177,22.667 v1(-39.116,22.606)
DB_4: J1.16 J2.25 | length 33.9
  Top Copper w0.18: v1(-45.139,14.607) -45.108,14.577 J1.16 ; v1(-38.227,21.717) -37.81,22.134 J2.25
  Bottom Copper w0.18: v1(-45.139,14.607) -45.174,14.642 -45.174,14.948 -45.974,15.748 -48.514,15.748 -49.276,16.51 -49.276,21.463 -48.133,22.606 -40.259,22.606 -39.37,21.717 v1(-38.227,21.717)
DB_5: J1.17 J2.24 | length 34.2
  Top Copper w0.18: J1.17 -44.592,10.683 -44.592,13.828 v1(-44.577,13.843) ; v1(-38.766,20.879) -38.756,20.889 -38.166,20.889 -37.31,21.745 J2.24
  Bottom Copper w0.18: v1(-44.577,13.843) -44.577,15.113 -45.847,16.383 -48.006,16.383 -48.768,17.145 -48.768,21.336 -48.006,22.098 -40.513,22.098 -39.243,20.828 -38.817,20.828 v1(-38.766,20.879)
DB_6: J1.18 J2.22 | length 34.8
  Top Copper w0.18: J1.18 -44.088,10.687 -44.088,12.681 v1(-44.069,12.7) ; v1(-36.322,21.844) -36.316,21.85 -36.316,29.562 J2.22
  Bottom Copper w0.18: v1(-44.069,12.7) -44.034,12.735 -44.034,15.656 -45.268,16.891 -47.752,16.891 -48.26,17.399 -48.26,21.209 -47.879,21.59 -40.894,21.59 -39.575,20.271 -37.895,20.271 v1(-36.322,21.844)
DB_7: J1.19 J2.26 | length 33.4
  Top Copper w0.18: J1.19 -43.585,10.692 -43.585,13.057 v1(-43.561,13.081) ; v1(-40.386,19.812) -40.386,20.447 -38.31,22.523 J2.26
  Bottom Copper w0.18: v1(-43.561,13.081) -43.5,13.02 -43.5,12.844 -43.356,12.7 -42.904,12.7 -42.799,12.805 -42.799,13.335 -43.561,14.097 -43.561,16.002 -44.958,17.399 -47.217,17.399 -47.625,17.807 -47.625,20.193 -46.609,21.209 -41.148,21.209 -40.386,20.447 v1(-40.386,19.812)
DCLK: J1.38 J2.30 | length 33.8
  Top Copper w0.18: J2.30 -40.31,28.499 -39.274,27.463 v1(-39.274,24.941) ; J1.38 -34.108,11.484 -33.511,12.081 -33.285,12.081 v1(-33.224,12.142)
  Bottom Copper w0.18: v1(-39.274,24.941) -39.274,26.258 -38.608,26.924 -31.369,26.924 -30.607,26.162 -30.607,12.827 -31.292,12.142 v1(-33.224,12.142)
DE: J1.52 J2.28 | length 33.8
  Top Copper w0.18: v1(-39.34,28.351) -39.34,29.538 J2.28 ; J1.52 -27.079,10.696 -27.079,12.037 v1(-27.051,12.065)
  Bottom Copper w0.18: v1(-39.34,28.351) -37.719,28.351 -37.629,28.351 -37.457,28.523 -37.457,28.975 -37.285,29.147 -36.941,29.147 -36.769,28.975 -36.769,27.727 -36.597,27.555 -36.253,27.555 -36.081,27.727 -36.081,28.975 -35.909,29.147 -35.565,29.147 -35.393,28.975 -35.393,27.905 -35.221,27.733 -34.877,27.733 -34.705,27.905 -34.705,28.179 -34.533,28.351 -32.766,28.351 -31.526,28.351 -26.875,23.7 -26.875,18.014 -27.051,17.838 v1(-27.051,12.065)
DG_0: J1.20 J2.33 | length 32.7
  Top Copper w0.18: J1.20 -43.108,13.193 -42.926,13.375 v1(-42.926,14.224) ; J2.33 -41.81,28.348 -40.767,27.305 -40.767,24.003 -40.767,23.643 -40.595,23.471 -39.718,23.471 -39.546,23.299 -39.546,22.955 -39.718,22.783 -41.38,22.783 -41.552,22.611 -41.552,22.267 -41.38,22.095 -41.282,22.095 -41.11,21.923 -41.11,21.68 -41.2,21.59 -41.275,21.515 v1(-41.275,19.939)
  Bottom Copper w0.18: v1(-42.926,14.224) -42.926,16.256 -44.577,17.907 -46.99,17.907 -47.244,18.161 -47.244,19.939 -46.355,20.828 -41.783,20.828 -41.336,20.381 -41.336,20 v1(-41.275,19.939)
DG_1: J1.21 J2.35 | length 33.1
  Top Copper w0.18: J2.35 -42.81,27.824 -41.91,26.924 -41.91,19.177 v1(-41.021,18.288) ; J1.21 -42.608,12.51 v1(-42.164,12.954)
  Bottom Copper w0.18: v1(-42.164,12.954) -42.164,16.129 -44.323,18.288 -46.482,18.288 -46.736,18.542 -46.736,19.685 -46.101,20.32 -42.926,20.32 -42.672,20.066 -42.672,19.431 -42.418,19.177 -42.418,19.156 -42.142,19.156 -42.037,19.261 -42.037,19.558 -41.91,19.685 -41.783,19.685 -41.559,19.461 -41.051,19.461 -40.767,19.177 -40.767,18.553 -41.021,18.299 v1(-41.021,18.288)
DG_2: J1.22 J2.14 | length 33.8
  Top Copper w0.18: J1.22 -42.072,10.703 -42.072,12.03 v1(-42.037,12.065) ; v1(-32.38,20.193) -32.38,29.003 -32.37,29.013 -32.37,29.508 J2.14
  Bottom Copper w0.18: v1(-42.037,12.065) -41.976,12.126 -41.634,12.126 -41.529,12.232 -41.529,12.827 -40.767,13.589 -40.767,16.764 -40.386,17.145 -40.386,18.415 -38.989,19.812 -37.719,19.812 -37.338,20.193 -36.957,20.193 -35.433,21.717 -35.433,23.622 -35.052,24.003 -32.639,24.003 -32.38,23.744 -32.38,22.987 -32.38,22.897 -32.208,22.725 -32.046,22.725 -31.874,22.553 -31.874,22.209 -32.046,22.037 -32.208,22.037 -32.38,21.865 -32.38,21.082 v1(-32.38,20.193)
DG_3: J1.23 J2.15 | length 33.7
  Top Copper w0.18: J1.23 -41.601,10.661 v1(-41.601,9.396) ; v1(-34.29,13.462) -32.81,14.942 J2.15
  Bottom Copper w0.18: v1(-41.601,9.396) -40.64,9.396 -40.55,9.396 -40.378,9.568 -40.378,9.718 -40.206,9.89 -39.862,9.89 -39.69,9.718 -39.69,8.405 -39.518,8.233 -39.174,8.233 -39.002,8.405 -39.002,9.718 -38.83,9.89 -38.486,9.89 -38.314,9.718 -38.314,8.589 -38.142,8.417 -37.798,8.417 -37.626,8.589 -37.626,9.224 -37.454,9.396 -36.068,9.396 -35.816,9.396 -34.29,10.922 v1(-34.29,13.462)
DG_4: J1.24 J2.36 | length 21.6
  Top Copper w0.18: J2.36 -43.31,27.689 -42.291,26.67 -42.291,18.542 -41.336,17.587 -41.082,17.587 v1(-41.021,17.526) ; v1(-41.529,14.097) -41.48,14.048 -41.48,11.889 -41.108,11.517 J1.24
  Bottom Copper w0.18: v1(-41.529,14.097) -41.529,14.351 -41.529,14.441 -41.701,14.613 -41.722,14.613 -41.894,14.785 -41.894,15.129 -41.722,15.301 -41.209,15.301 -41.037,15.473 -41.037,15.817 -41.209,15.989 -41.357,15.989 -41.529,16.161 -41.529,16.511 -41.656,16.637 -41.656,16.891 v1(-41.021,17.526)
DG_5: J1.25 J2.16 | length 32.9
  Top Copper w0.18: v1(-40.894,12.446) -40.894,11.811 -40.608,11.525 J1.25 ; J2.16 -33.292,29.55 -33.292,19.576 v1(-33.274,19.558)
  Bottom Copper w0.18: v1@-40.883,12.446 -39.497,12.446 -38.481,13.462 -38.481,13.843 -38.481,13.933 -38.653,14.105 -38.837,14.105 -39.009,14.277 -39.009,14.621 -38.837,14.793 -38.653,14.793 -38.481,14.965 -38.481,15.748 -38.481,16.764 -36.846,18.399 -36.846,19.669 -34.925,21.59 -34.925,23.241 -34.544,23.622 -33.147,23.622 -32.893,23.368 -32.893,19.939 v1(-33.274,19.558)
DG_6: J1.26 J2.17 | length 33.9
  Top Copper w0.18: v1(-40.132,11.938) -40.12,11.926 -40.12,10.68 J1.26 ; J2.17 -33.782,29.54 -33.782,19.431 v1(-33.782,18.415)
  Bottom Copper w0.18: v1(-40.132,11.938) -39.116,11.938 -37.973,13.081 -37.973,16.764 -36.322,18.415 -36.322,19.558 -34.29,21.59 -34.29,22.882 -34.185,22.987 -33.379,22.987 -33.274,22.882 -33.274,20.701 -34.29,19.685 -34.608,19.685 -35.052,19.241 -35.052,18.796 -34.671,18.415 v1(-33.782,18.415)
DG_7: J1.27 J2.37 | length 34
  Top Copper w0.18: J2.37 -43.81,27.554 -42.799,26.543 -42.799,18.415 -39.812,15.428 -39.812,15.174 v1(-39.751,15.113) ; v1(-40.132,13.208) -39.608,12.684 J1.27
  Bottom Copper w0.18: v1(-40.132,13.208) -40.12,13.22 -39.612,13.22 -39.243,13.589 -39.243,13.97 -39.497,14.224 -40.005,14.224 -40.386,14.605 -40.386,16.256 -39.878,16.764 -39.878,18.161 -38.735,19.304 -37.443,19.304 -37.338,19.199 -37.338,18.542 -38.862,17.018 -38.862,15.367 -39.116,15.113 v1(-39.751,15.113)
DR_0: J1.28 J2.38 | length 36
  Top Copper w0.18: J2.38 -44.31,25.794 -45.085,25.019 -45.085,24.638 -45.085,24.427 -45.257,24.255 -45.429,24.083 -45.429,23.739 -45.257,23.567 -44.233,23.567 -44.061,23.395 -44.061,23.051 -44.233,22.879 -45.659,22.879 -45.831,22.707 -45.831,22.363 -45.659,22.191 -44.13,22.191 -43.958,22.019 -43.958,21.675 -44.13,21.503 -45.659,21.503 -45.831,21.331 -45.831,20.987 -45.659,20.815 -44.13,20.815 -43.958,20.643 -43.958,20.299 -44.13,20.127 -45.659,20.127 -45.831,19.955 -45.831,19.611 -45.659,19.439 -45.257,19.439 -45.085,19.267 -45.085,19.177 -45.085,17.653 -46.736,16.002 -46.736,15.621 -46.355,15.24 -44.323,15.24 -43.942,14.859 -41.148,14.859 -39.108,12.819 J1.28
DR_1: J1.29 J2.40 | length 32.9
  Top Copper w0.18: v1(-45.593,26.924) -45.593,27.011 -45.31,27.294 J2.40 ; v1(-43.725,26.461) -43.688,26.424 -43.688,19.812 -43.688,18.124 -44.995,16.818 -44.995,16.574 -44.752,16.331 -44.508,16.331 -43.051,17.788 -42.808,17.788 -42.565,17.545 -42.565,17.302 -44.022,15.845 -44.022,15.601 -43.779,15.358 -43.535,15.358 -42.078,16.815 -41.835,16.815 -41.592,16.572 -41.592,16.329 -42.183,15.737 -42.183,15.494 -41.94,15.251 -41.697,15.251 -41.359,15.589 -41.116,15.589 -40.958,15.431 -40.894,15.367 -38.608,13.081 J1.29
  Bottom Copper w0.18: v1(-45.593,26.924) -45.13,26.461 v1(-43.725,26.461)
DR_2: J1.30 J2.20 | length 36.1
  Top Copper w0.18: J1.30 -38.108,13.089 -39.116,14.097 -39.116,15.24 -40.386,16.51 -40.386,18.923 -39.116,20.193 -38.354,20.193 -37.465,21.082 -36.703,21.082 -36.576,20.955 -36.576,18.552 -37.306,17.822 -37.306,16.734 -37.306,16.351 -36.703,15.748 -36.449,15.748 -36.322,15.875 -36.322,16.51 -36.195,16.637 -35.814,16.637 -35.687,16.51 -35.687,16.002 -35.558,15.873 -35.435,15.873 -35.31,15.998 J2.20
DR_3: J1.31 J2.19 | length 36.2
  Top Copper w0.18: J1.31 -37.608,14.24 -40.005,16.637 -40.005,18.796 -38.989,19.812 -38.1,19.812 -37.592,20.32 -37.084,20.32 -36.957,20.193 -36.957,18.796 -37.719,18.034 -37.719,16.256 -36.846,15.383 -34.915,15.383 -34.81,15.488 -34.81,15.601 -34.81,16.379 -34.638,16.551 -33.942,16.551 -33.77,16.723 -33.77,17.067 -33.942,17.239 -34.638,17.239 -34.81,17.411 -34.81,18.28 J2.19
DR_4: J1.32 J2.21 | length 34.2
  Top Copper w0.18: J1.32 -37.108,13.438 v1(-36.703,13.843) ; v1(-36.068,17.399) -36.068,17.486 -35.81,17.744 J2.21
  Bottom Copper w0.18: v1(-36.703,13.843) -35.433,15.113 -33.909,15.113 -32.131,16.891 -31.369,16.891 -30.988,17.272 -30.988,20.955 -31.242,21.209 -31.75,21.209 -31.877,21.082 -31.877,19.304 -33.401,17.78 -35.687,17.78 v1(-36.068,17.399)
DR_5: J1.33 J2.23 | length 34
  Top Copper w0.18: v1(-36.83,16.764) -36.83,17.653 -36.195,18.288 -36.195,20.975 -36.81,21.59 J2.23 ; J1.33 -36.608,12.822 v1(-35.764,13.666)
  Bottom Copper w0.18: v1(-36.83,16.764) -35.687,16.764 -35.179,17.272 -33.401,17.272 -32.131,18.542 -31.474,18.542 -31.369,18.437 -31.369,17.653 -31.75,17.272 -32.385,17.272 -34.163,15.494 -36.195,15.494 -37.465,14.224 -37.465,13.336 -37.36,13.23 -36.2,13.23 v1(-35.764,13.666)
DR_6: J1.34 J2.39 | length 33.7
  Top Copper w0.18: v1(-47.726,12.129) -47.726,13.961 -47.726,14.051 -47.898,14.223 -48.209,14.223 -48.381,14.395 -48.381,14.739 -48.209,14.911 -47.898,14.911 -47.726,15.083 -47.726,15.494 -47.726,16.028 -46.101,17.653 -46.101,25.4 -44.831,26.67 -44.831,29.547 J2.39 ; J1.34 -36.088,10.688 -36.088,12.299 v1(-36.068,12.319)
  Bottom Copper w0.18: v1(-47.726,12.129) -46.773,11.176 -38.227,11.176 -37.084,12.319 v1(-36.068,12.319)
DR_7: J1.35 J2.18 | length 36
  Top Copper w0.18: J1.35 -35.608,12.017 -34.959,12.666 -34.959,13.877 -35.306,14.224 -36.386,14.224 -36.639,14.478 -37.337,14.478 -38.544,15.685 -38.544,15.7 -39.624,16.78 -39.624,18.669 -38.862,19.431 -38.205,19.431 -38.1,19.326 -38.1,16.129 -36.957,14.986 -34.29,14.986 -33.274,16.002 -33.274,17.125 -34.31,18.161 J2.18
GND: C1.2 C2.1 J1.53 J1.54 J1.SH J2.4 J2.29 J2.31 J2.SH R8.1 R9.1 U1.2 | length 10.2
  Top Copper w0.3: R8.1 v1(-56.515,24.257) ; v1(-55.753,22.606) U1.2@-54.991,22.606 ; v1(-55.245,25.527) C2.1 ; v1(-53.086,18.288) -52.236,18.288 R9.1 ; C1.2@-48.641,20.535 -48.509,20.667 -47.967,20.667 -47.679,20.955 v1(-47.625,20.955) ; J2.31 v1(-40.81,30.683) ; J2.29 v1(-39.81,30.683) ; v1(-27.31,28.453) J2.4 ; v1(-26.608,9.553) J1.53 ; J1.54 v1(-26.108,11.783)
  other v1: -55.02,6.258 -52.52,6.258 -50.02,6.258 -30.02,6.258 -27.52,6.258 -25.02,6.258 -22.52,6.258 -54.508,7.668 -24.208,7.668 -51.27,8.758 -46.27,8.758 -43.77,8.758 -41.27,8.758 -36.27,8.758 -33.77,8.758 -28.77,8.758 -26.27,8.758 -21.27,8.758 -55.02,11.258 -25.02,11.258 -22.52,11.258 -26.27,13.758 -23.77,13.758 -21.27,13.758 -52.52,16.258 -25.02,16.258 -22.52,16.258 -53.77,18.758 -23.77,18.758 -21.27,18.758 -22.52,21.258 -23.77,23.758 -21.27,23.758 -47.52,26.258 -22.52,26.258 -53.77,28.758 -48.77,28.758 -23.77,28.758 -21.27,28.758 -55.02,31.258 -52.52,31.258 -46.98,31.268 -24.14,31.268 -22.52,31.258 -53.77,33.758 -23.77,33.758 -21.27,33.758
GPIO_2: J1.37 J2.11 | length 36.6
  Top Copper w0.18: J1.37 -34.548,10.728 -34.548,11.807 -30.734,15.621 -29.591,15.621 -27.559,17.653 -27.559,17.921 -27.559,18.011 -27.731,18.183 -29.578,18.183 -29.75,18.355 -29.75,18.699 -29.578,18.871 -26.802,18.871 -26.63,19.043 -26.63,19.387 -26.802,19.559 -29.578,19.559 -29.75,19.731 -29.75,20.075 -29.578,20.247 -27.731,20.247 -27.559,20.419 -27.559,20.574 -27.559,20.828 -27.432,20.955 -26.797,20.955 -26.67,21.082 -26.67,21.971 -26.924,22.225 -30.099,22.225 -30.81,22.936 J2.11
GPIO_3: J1.36 J2.12 | length 36
  Top Copper w0.18: J1.36 -35.108,11.882 -31.31,15.68 -31.31,15.875 -31.31,16.653 -31.138,16.825 -28.941,16.825 -28.769,16.997 -28.769,17.341 -28.941,17.513 -31.416,17.513 -31.588,17.685 -31.588,18.029 -31.416,18.201 -30.348,18.201 -30.176,18.373 -30.176,18.717 -30.348,18.889 -31.368,18.889 -31.54,19.061 -31.54,19.405 -31.368,19.577 -30.348,19.577 -30.176,19.749 -30.176,20.093 -30.348,20.265 -31.368,20.265 -31.54,20.437 -31.54,20.781 -31.368,20.953 -28.459,20.953 -28.287,21.125 -28.287,21.469 -28.459,21.641 -31.138,21.641 -31.31,21.813 -31.31,22.987 J2.12
LED+: C1.1 D1.1 J1.3 J1.4 TEST1.1 U1.5
LED-: J1.1 J1.2 R8.2 TEST2.1 U1.3
NetD1_2: D1.2 L1.2 U1.1
NetJ1_9: J1.9 R5.1 | length 37
  Top Copper w0.18: v1(-48.895,7.747) -48.895,7.834 -48.608,8.121 J1.9 ; v1(-29.845,22.987) R5.1
  Bottom Copper w0.18: v1(-48.895,7.747) -32.385,7.747 -29.845,10.287 v1(-29.845,22.987)
NetJ1_10: J1.10 R6.1 | length 38.1
  Top Copper w0.18: v1(-48.133,6.985) -48.108,7.01 J1.10 ; v1(-28.575,23.114) R6.1
  Bottom Copper w0.18: v1(-48.133,6.985) -32.512,6.985 -29.464,10.033 -29.464,22.225 v1(-28.575,23.114)
NetJ1_11: J1.11 R7.1 | length 39.1
  Top Copper w0.18: J1.11 -47.608,6.841 v1(-47.117,6.35) ; v1(-27.305,22.987) R7.1
  Bottom Copper w0.18: v1(-47.117,6.35) -32.512,6.35 -29.083,9.779 -29.083,21.209 v1(-27.305,22.987)
RESET_LCD: J1.8 J2.6 | length 41.1
  Top Copper w0.18: J1.8 -49.108,15.154 -46.482,17.78 v1(-46.482,26.67) ; v1(-28.321,30.861) -28.316,30.856 -28.316,29.574 J2.6
  Bottom Copper w0.18: v1(-46.482,26.67) -46.482,30.353 -45.212,31.623 -29.083,31.623 v1(-28.321,30.861)
SPI_MISO: J2.7
SPI_MOSI: J2.8 R7.2 | length 5.1
  Top Copper w0.18: J2.8 -29.31,28.04 -28.956,27.686 -27.94,27.686 -27.305,27.051 R7.2
V_SYS: C2.2 J2.2 J2.3 L1.1 U1.6
pads on no net: J1.5 J1.6 J1.7 J1.39 J1.40 J1.43 J1.44 J1.45 J1.46 J1.47 J1.48 J1.49 J1.50 J1.51

## Polygon pours and split planes (outlines as drawn)
NetD1_2 on Top Copper "NONET_L-01_P-001" (solid, pour order 4): -48.641,22.225 -49.149,22.225 -49.53,21.844 -49.53,20.701 -49.784,20.447 -50.419,20.447 -50.546,20.574 -50.546,21.463 -51.308,22.225 -53.086,22.225 -54.102,23.241 -55.372,23.241 -55.499,23.368 -55.499,23.876 -55.372,24.003 -53.721,24.003 -53.213,23.495 -53.213,23.241 -52.959,22.987 -51.181,22.987 -50.927,23.241 -48.641,23.241
3V3_SYS on Top Copper "NONET_L-01_P-001" (solid, pour order 2): -32.766,10.414 -32.766,11.938 -26.162,18.542 -26.035,18.669 -26.035,29.718 -25.654,29.718 -25.146,29.21 -25.146,18.161 -32.004,11.303 -32.004,10.414
V_SYS on Top Copper "NONET_L-01_P-001" (solid, pour order 3): -27.051,29.464 -27.051,32.512 -27.559,33.02 -48.768,33.02 -49.276,32.512 -49.276,26.924 -48.641,26.289 -48.641,23.876 -48.768,23.749 -51.308,23.749 -51.435,23.622 -51.435,23.368 -51.562,23.241 -52.832,23.241 -52.959,23.368 -52.959,26.543 -51.943,27.559 -51.943,33.02 -50.038,34.925 -27.051,34.925 -25.781,33.655 -25.781,30.48 -26.162,30.099 -26.162,29.464
LED- on Top Copper "NONET_L-01_P-001" (solid, pour order 1): -51.943,10.16 -51.943,11.43 -51.943,11.684 -54.737,14.478 -54.737,20.066 -53.975,20.828 -53.975,21.844 -54.229,22.098 -57.023,22.098 -57.277,21.844 -57.277,20.955 -56.388,20.066 -56.388,13.335 -53.213,10.16
LED+ on Top Copper "NONET_L-01_P-001" (solid, pour order 0): -51.816,10.414 -51.816,16.764 -50.8,17.78 -50.8,19.304 -50.546,19.558 -48.006,19.558 -47.752,19.304 -47.752,18.034 -47.752,17.653 -50.292,15.113 -50.292,12.192 -50.927,11.557 -50.927,10.414
GND on Signal Layer 1 "NONET_L-01_P-001" (solid, pour order 5): -59.944,37.084 -60.706,36.322 -60.706,1.778 -15.367,1.778 -12.827,4.318 -12.827,37.592
GND on Signal Layer 2 "NONET_L-01_P-001" (solid, pour order 6): -60.96,37.719 -60.96,2.286 -59.182,0.508 -58.928,0.762 -16.002,0.762 -11.811,4.953 -11.811,37.719 -13.335,39.243

## Silkscreen, mask and mechanical layers (free items; w line width, h text height)
Top Overlay:
  drawing of 23 lines, arcs and shapes, not listed
  text "40" at -46.482,27.559 h1.75
  text "BOT" at -37.757,27.104 h1.75
  text "1" at -26.035,27.051 h1.75
  text "CS" at -24.003,23.368 h1.75 r90
  text "CLK" at -22.606,23.368 h1.75 r90
  text "MOSI" at -21.209,23.368 h1.75 r90
  text "-" at -55.861,15.965 h1.75
  text "+" at -51.416,15.584 h1.75
  text "54" at -25.908,12.065 h1.75
  text "1" at -54.356,11.938 h1.75
  text "BOT" at -51.308,11.811 h1.75
Route Tool Path:
  circle w1.016: c135.491,238.477 r2.692
  lines w0: -13.294,-10.648 -12.113,-10.959 ccw(c-11.984,-10.468) -11.708,-10.894 -9.736,-9.617
Dimensions:
  lines w0.127: -57.785,5.08 -56.642,3.937 -46.482,3.937 -20.828,3.937 -19.939,4.826 -19.939,35.433 -20.574,36.068 -21.971,36.068 -22.733,35.306 -47.752,35.306 -48.387,35.941 -56.896,35.941 -57.785,35.052 -57.785,5.08